# Altium PCB PCB1.PcbDoc
Units mm, origin at the board's own origin, x right, y up, seen from the top; angles counter-clockwise.
Board outline 152.4 x 101.6 mm, 2 copper layers (Top Layer, Bottom Layer); 26 components, 36 nets, 145 pads, 0 vias.
Unrouted connection lines stored in the file: 1.
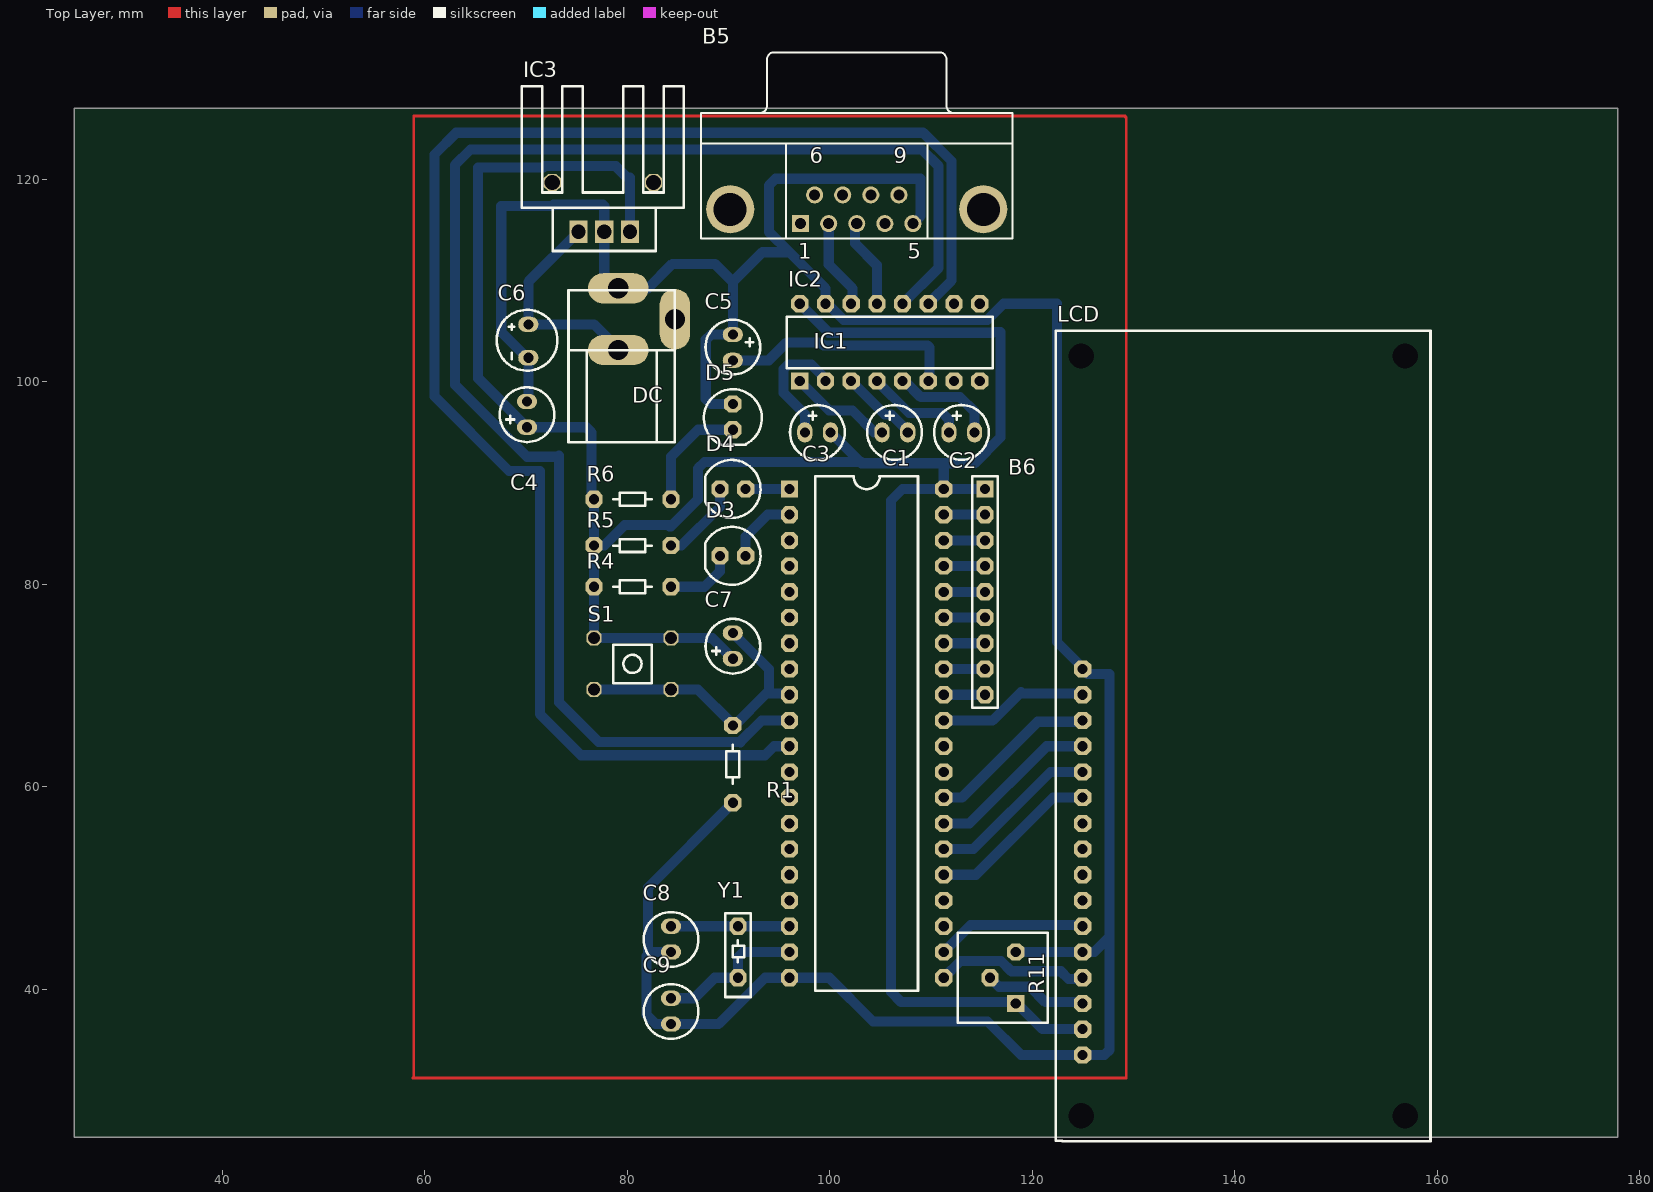
[diagram p0: Top Layer view]
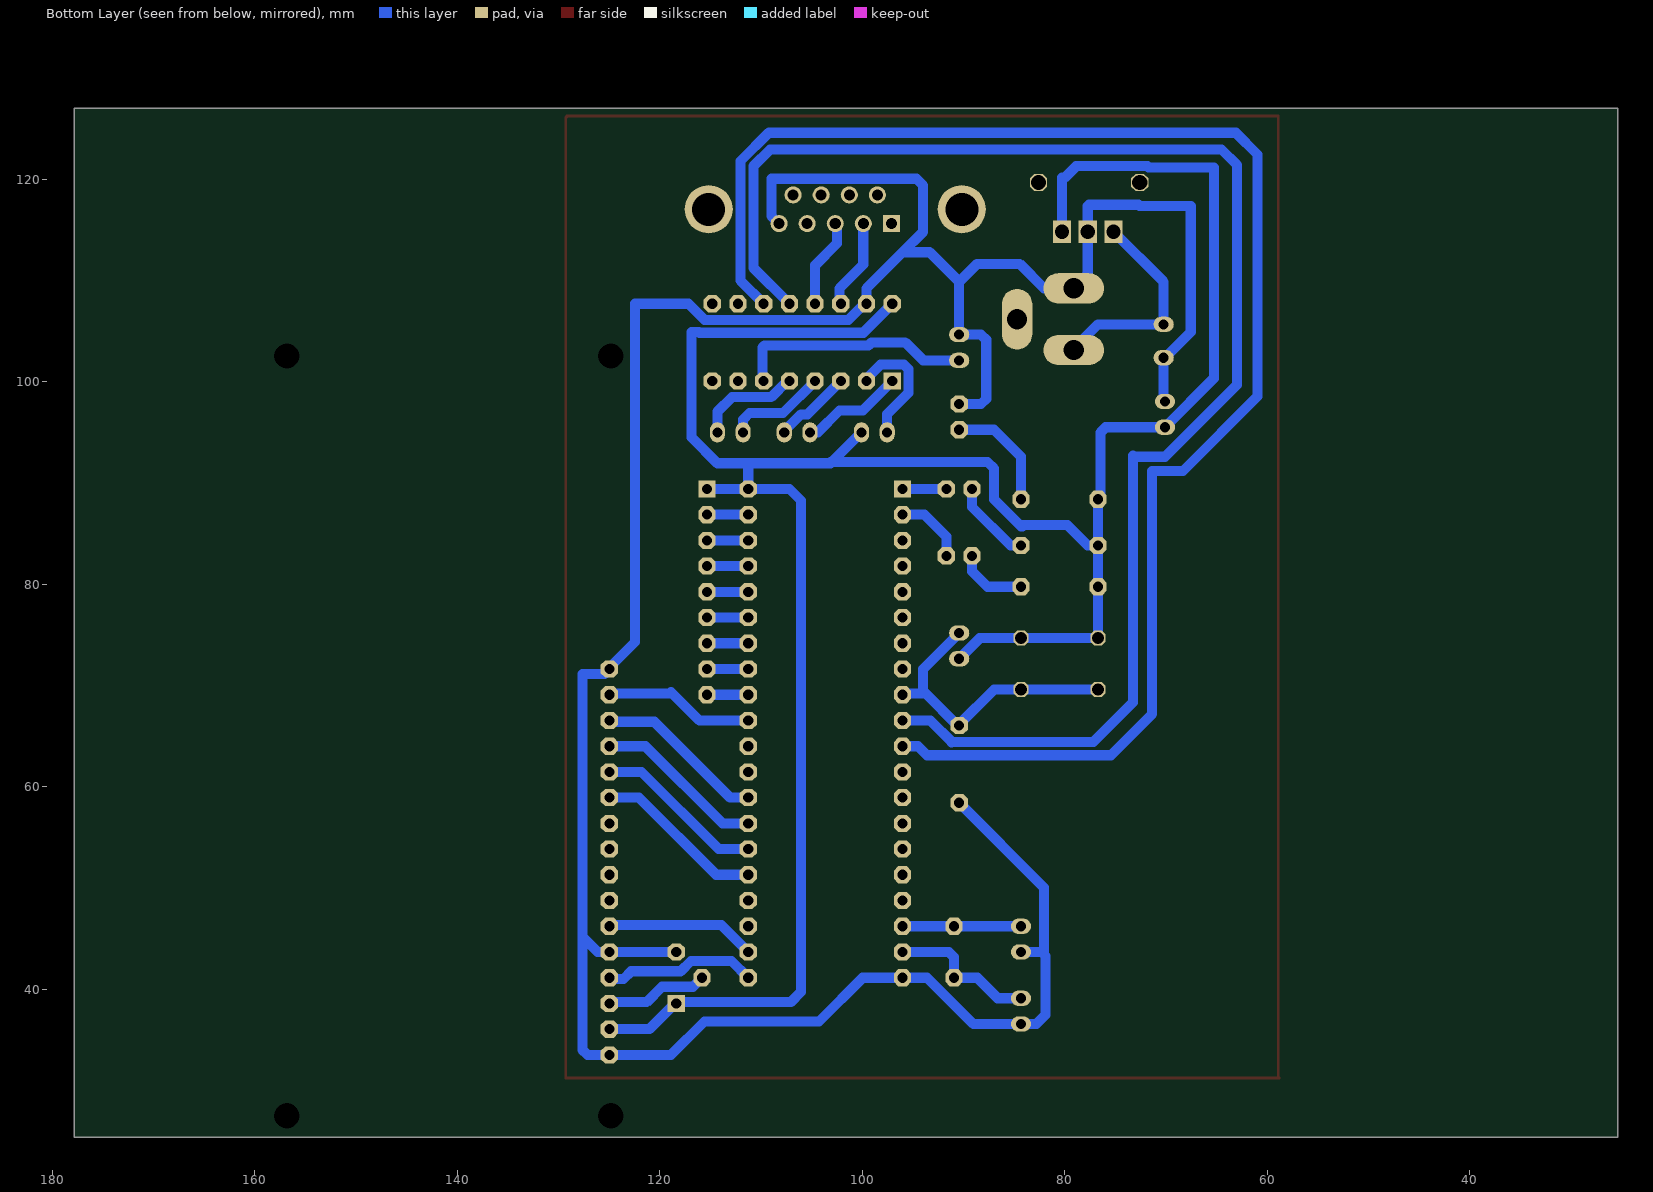
[diagram p1: Bottom Layer view, seen from below]

## Layer stack, top to bottom
Top Layer: signal copper 0.0356
Dielectric: dielectric 0.32, FR-4, Dk 4.8
Bottom Layer: signal copper 0.0356

## Board outline
25.4,25.4 177.8,25.4 177.8,127 25.4,127

## Design rules (kind name [scope] priority, off if disabled: settings)
Clearance [All] p1: gap=0.254
PolygonConnect [All] p1: connectstyle=Relief reliefconductorwidth=0.254 reliefentries=4 polygonreliefangle="90 Angle"
RoutingVias [All] p1: holewidth=0.711 width=1.27 viastyle="Through Hole" minholewidth=0.711 minwidth=1.27 maxholewidth=0.711 maxwidth=1.27
SilkscreenOverComponentPads [All] p1: minsilkscreentomaskgap=0.254
SolderMaskExpansion [All] p1: expansion=0.102
Width [All] p1: maxlimit=1 minlimit=1 preferedwidth=1
27 further rules are at their usual default settings.

## Components (designator, comment, footprint, x,y, rotation, side; value= is the part's Value field where it differs from the comment)
B5 "DB9 CONNECTOR FEMALE" "DB9 CONNECTOR FEMALE" 102.108,127 r0 top
B6 "BURG STRIP 9" bergstrip-9pin 115.316,89.408 r180 top
C1 "Cap2" CAP-100uf 105.156,94.996 r0 top
C2 "Cap2" CAP-100uf 111.76,94.996 r0 top
C3 "Cap2" CAP-100uf 97.536,94.996 r0 top
C4 "Cap2" CAP-100uf 70.104,95.504 r90 top
C5 "Cap2" CAP-100uf 90.424,104.648 r270 top
C6 "Cap-1000uf" CAP-1000uf 70.104,104.14 r270 top
C7 "Cap2" CAP-100uf 90.424,72.644 r90 top
C8 "Cap" CAP 84.328,43.688 r90 top
C9 "Cap" CAP 84.328,36.576 r90 top
D3 "LED-RED" LED-RED 90.424,82.804 r0 top
D4 "LED-RED" LED-RED 90.424,89.408 r0 top
D5 "LED-RED" LED-RED 90.424,96.52 r90 top
DC "PHONE JACK" "PHONE JACK" 74.168,93.98 r90 top
IC1 "AT89S52" AT89S52 96.012,89.408 r0 top
IC2 "dip-16pin" dip-16pin 114.808,100.076 r90 top
IC3 "Voltage Regulator" "7805 WITH HEAT-SINK" 75.184,114.808 r0 top
LCD "LCD-16X2" LCD-16x2 124.968,33.528 r90 top
R1 "Resistor" res-2.54x4 90.424,58.42 r90 top
R4 "Resistor" res-2.54x4 76.708,79.756 r0 top
R5 "Resistor" res-2.54x4 76.708,83.82 r0 top
R6 "Resistor" res-2.54x4 84.328,88.392 r180 top
R11 "Variable Resistor" reg-variable 115.824,41.148 r90 top
S1 "SW-PB" sw-pb 76.708,69.596 r90 top
Y1 "XTAL-LARGE" XTAL-LARGE 90.932,46.228 r270 top

## Footprints (in the part's own frame and the unit in brackets; to place one, negate y for a bottom-side part, rotate by r counter-clockwise, add the part's x,y. Pads: shape width x height; smd on the part's side, far side on the other; paste and mask are expansions set on the pad)
"7805 WITH HEAT-SINK" [mm]
  oct 1.7x1.7 hole 1.5: 0(-2.587,4.873) 0(7.413,4.873)
  rect 1.8x2.2 hole 1.4: 1(0,0) 2(2.54,0) 3(5.08,0)
  silkscreen extent -5.59,-1.91 10.41,14.37, body extent -5.59,-2.03 10.41,14.35, height 20.5
AT89S52 [mm]
  rect 1.7x1.7 hole 1: 1(0,0)
  oct 1.7x1.7 hole 1: 2(0,-2.54) 3(0,-5.08) 4(0,-7.62) 5(0,-10.16) 6(0,-12.7) 7(0,-15.24) 8(0,-17.78) 9(0,-20.32) 10(0,-22.86) 11(0,-25.4) 12(0,-27.94) 13(0,-30.48) 14(0,-33.02) 15(0,-35.56) 16(0,-38.1) 17(0,-40.64) 18(0,-43.18) 19(0,-45.72) 20(0,-48.26) 21(15.24,-48.26) 22(15.24,-45.72) 23(15.24,-43.18) 24(15.24,-40.64) 25(15.24,-38.1) 26(15.24,-35.56) 27(15.24,-33.02) 28(15.24,-30.48) 29(15.24,-27.94) 30(15.24,-25.4) 31(15.24,-22.86) 32(15.24,-20.32) 33(15.24,-17.78) 34(15.24,-15.24) 35(15.24,-12.7) 36(15.24,-10.16) 37(15.24,-7.62) 38(15.24,-5.08) 39(15.24,-2.54) 40(15.24,0)
  silkscreen extent 2.54,-49.53 12.7,1.27, body extent -0.76,-49.53 15.73,1.32, height 3
bergstrip-9pin [mm]
  rect 1.7x1.7 hole 1: 1(0,0)
  oct 1.7x1.7 hole 1: 2(0,2.54) 3(0,5.08) 4(0,7.62) 5(0,10.16) 6(0,12.7) 7(0,15.24) 8(0,17.78) 9(0,20.32)
  silkscreen extent -1.27,-1.27 1.27,21.59, body extent -1.27,-1.27 1.27,21.59, height 9.89
CAP [mm]
  oval 1.5x2 hole 1: 1(0,0) 2(2.54,0)
  silkscreen extent -1.46,-2.7 3.94,2.7, body extent -1.75,-3.04 4.32,3.04, height 7.01
CAP-100uf [mm]
  oval 1.5x2 hole 1: 1(0,0) 2(2.54,0)
  silkscreen extent -1.46,-2.7 3.94,2.7, body extent -1.75,-3.04 4.32,3.04, height 7.01
CAP-1000uf [mm]
  oval 1.5x2 hole 1: 1(-1.524,0.127) 2(1.778,0.127)
  silkscreen extent -2.95,-3 3.05,3, body extent -3.02,-3.05 3.05,3.04, height 10.1
"DB9 CONNECTOR FEMALE" [mm]
  rect 1.69x1.69 hole 1.09: 1(-4.986,-11.395)
  round 1.69 hole 1.09: 2(-2.216,-11.395) 3(0.554,-11.395) 4(3.324,-11.395) 5(6.094,-11.395) 6(-3.601,-8.555) 7(-0.831,-8.555) 8(1.939,-8.555) 9(4.709,-8.555)
  round 4.76 hole 3.26: 10(-11.941,-9.975) 11(13.049,-9.975)
  silkscreen extent -14.85,-12.88 15.95,5.53, body extent -14.94,-12.92 16.05,5.62, height 15
dip-16pin [mm]
  rect 1.7x1.7 hole 1: 1(0,17.78)
  oct 1.7x1.7 hole 1: 2(0,15.24) 3(0,12.7) 4(0,10.16) 5(0,7.62) 6(0,5.08) 7(0,2.54) 8(0,0) 9(7.62,0) 10(7.62,2.54) 11(7.62,5.08) 12(7.62,7.62) 13(7.62,10.16) 14(7.62,12.7) 15(7.62,15.24) 16(7.62,17.78)
  silkscreen extent 1.27,-1.27 6.35,19.05, body extent -0.13,-1.27 7.87,19.05, height 2.51
LCD-16x2 [mm]
  oct 1.7x1.7 hole 1: 1(0,0) 2(2.54,0) 3(5.08,0) 4(7.62,0) 5(10.16,0) 6(12.7,0) 7(15.24,0) 8(17.78,0) 9(20.32,0) 10(22.86,0) 11(25.4,0) 12(27.94,0) 13(30.48,0) 14(33.02,0) 15(35.56,0) 16(38.1,0)
  round 1.524 hole 2.5: no(-6,0.15) no(-6,-31.85) no(69,-31.85) no(69,0.15)
  silkscreen extent -8.51,-34.35 71.5,2.65, body extent -8.38,-34.04 71.37,2.67, height 21.6
LED-RED [mm]
  oct 1.7x1.7 hole 1: 1(-1.27,0) 2(1.27,0)
  silkscreen extent -2.74,-2.86 2.74,2.86, body extent -2.91,-2.67 2.67,2.92, height 9
"PHONE JACK" [mm]
  oval 3x6 hole 2: 1(9.144,-4.953) 2(15.24,-4.953)
  oval 6x3 hole 2: 3(12.192,-10.541)
  silkscreen extent 0.04,-10.53 15.04,-0.03, body extent -0.03,-10.67 16.78,0, height 8.97
reg-variable [mm]
  rect 1.7x1.7 hole 1: 1(-2.54,-2.54)
  oct 1.7x1.7 hole 1: 2(0,0) 3(2.54,-2.54)
  silkscreen extent -4.44,-5.71 4.44,3.18, body extent -4.44,-5.71 4.44,3.18, height 5.1
res-2.54x4 [mm]
  oct 1.7x1.7 hole 1: 1(0,0) 2(7.62,0)
  silkscreen extent 1.91,-0.63 5.71,0.64, body extent -0.51,-0.98 8.11,1.02, height 3
sw-pb [mm]
  oct 1.5x1.5 hole 1.2: 1(0,0) 1(0,-7.62) 2(5.08,0) 2(5.08,-7.62)
  silkscreen extent 0.64,-5.71 4.44,-1.9, body extent -0.76,-8.38 5.84,0.76, height 5.5
XTAL-LARGE [mm]
  oct 1.7x1.7 hole 1: 1(0,0) 2(5.08,0)
  silkscreen extent -1.27,-1.27 6.98,1.27, body extent -2.07,-2.25 7.87,2.19, height 13.15

## Part data
C8 C9: "Capacitor"
D3 D4 D5: "Typical BLUE SiC LED"
IC3: library part "7805 HEATSINK"
R1 R4 R5 R6: library part "Resistor 2.54x4"
S1: "Switch"
Y1: "Crystal Oscillator"

## Nets (pads, with @x,y where several pads share a name; then routed paths per layer and width w, separated by ;. In a path a pad name is that pad's centre, name@x,y a point inside that pad or via, vN(x,y) a via of type N, cw(c..) or ccw(c..) an arc to the next point about the centre after c; other vN are vias at no path point)
12V: C6.1 DC.1 IC3.1 | length 21.1
  Bottom Layer w1: C6.1 76.708,105.664 DC.1@79.248,103.124 ; C6.1@70.231,105.791 70.231,109.855 IC3.1
D4: IC1.25 LCD.11 | length 16.9
  Bottom Layer w1: IC1.25 114.427,51.308 122.047,58.928 LCD.11
D5: IC1.26 LCD.12 | length 16.9
  Bottom Layer w1: IC1.26 114.173,53.848 121.793,61.468 LCD.12
D6: IC1.27 LCD.13 | length 16.9
  Bottom Layer w1: IC1.27 113.792,56.388 121.412,64.008 LCD.13
D7: IC1.28 LCD.14 | length 16.9
  Bottom Layer w1: IC1.28 113.03,58.928 120.523,66.421 124.841,66.421 LCD.14
E: IC1.22 LCD.6 | length 14.9
  Bottom Layer w1: IC1.22 113.919,46.355 124.841,46.355 LCD.6
GND: B5.5 C4.2 C5.1 C6.2 C8.1 C9.1 D5.2 DC.2 IC1.20 IC2.15 IC3.2 LCD.1 LCD.5 LCD.16 R1.1 R11.3 | length 299
  Bottom Layer w1: C4.2@70.231,98.171 C6.2@70.231,102.235 ; C6.2 C6.2@70.231,102.235 ; DC.2@79.121,109.093 DC.2 ; 81.915,43.307 81.915,37.465 82.804,36.576 ; 82.042,43.434 82.042,50.038 R1.1 ; 82.296,43.688 C8.1 ; 82.931,36.576 C9.1 89.027,36.576 93.599,41.148 IC1.20 99.949,41.148 104.267,36.83 115.57,36.83 118.872,33.528 LCD.1 125.095,33.528 127.127,33.528 127.635,34.036 127.635,45.212 ; D5.2 88.265,97.79 87.757,98.298 87.757,104.14 88.265,104.648 C5.1 90.424,109.855 ; IC2.15@99.568,107.569 IC2.15 ; B5.5 108.966,116.369 108.966,120.015 ; 108.937,120.044 94.644,120.044 93.98,119.38 93.98,114.808 96.012,112.776 ; R11.3 LCD.5 126.111,43.688 127.635,45.212 ; LCD.16 125.476,71.12 127.635,71.12 127.635,45.212 ; LCD.16@125.095,71.628 122.428,74.295 122.428,107.696 117.149,107.696 115.545,106.092 101.371,106.092 99.767,107.696 IC2.15 ; C6.2@70.231,102.235 67.564,104.902 67.564,117.348 72.589,117.348 72.597,117.34 72.732,117.475 77.597,117.475 77.724,117.348 IC3.2 77.724,110.617 DC.2 ; DC.2 82.042,109.22 84.455,111.633 88.646,111.633 90.424,109.855 ; 90.424,109.855 93.345,112.776 96.012,112.776 ; 96.012,112.776 99.568,109.22 IC2.15
NetB6_2: B6.2 IC1.39 | length 4.1
  Bottom Layer w1: IC1.39 B6.2
NetB6_3: B6.3 IC1.38 | length 4.1
  Bottom Layer w1: IC1.38 B6.3
NetB6_4: B6.4 IC1.37 | length 4.1
  Bottom Layer w1: IC1.37 B6.4
NetB6_5: B6.5 IC1.36 | length 4.1
  Bottom Layer w1: IC1.36 B6.5
NetB6_6: B6.6 IC1.35 | length 4.1
  Bottom Layer w1: IC1.35 B6.6
NetB6_7: B6.7 IC1.34 | length 4.1
  Bottom Layer w1: IC1.34 B6.7
NetB6_8: B6.8 IC1.33 | length 4.1
  Bottom Layer w1: IC1.33 B6.8
NetB6_9: B6.9 IC1.32 | length 4.1
  Bottom Layer w1: IC1.32 B6.9
NetC1_1: C1.1 IC2.1 | length 10.2
  Bottom Layer w1: IC2.1 99.949,97.155 102.235,97.155 104.394,94.996 C1.1
NetC1_2: C1.2 IC2.3 | length 7.8
  Bottom Layer w1: IC2.3 105.41,96.774 106.045,96.774 107.696,95.123 C1.2
NetC2_1: C2.1 IC2.4 | length 10
  Bottom Layer w1: IC2.4 107.823,96.901 111.125,96.901 111.76,96.266 C2.1
NetC2_2: C2.2 IC2.5 | length 10.4
  Bottom Layer w1: IC2.5 107.387,100.076 108.991,98.472 112.856,98.472 114.3,97.028 C2.2
NetC3_1: C3.1 IC2.2 | length 12.2
  Bottom Layer w1: C3.1 97.536,96.802 95.424,98.914 95.424,101.238 95.866,101.68 98.19,101.68 99.568,100.302 IC2.2
NetC5_2: C5.2 IC2.6 | length 23.7
  Bottom Layer w1: C5.2 93.98,102.108 95.758,103.886 99.065,103.886 99.367,103.584 109.649,103.584 109.855,103.378 109.855,100.33 IC2.6@109.728,100.203 ; IC2.6@109.728,99.949 IC2.6
NetD3_1: D3.1 R4.2 | length 7.2
  Bottom Layer w1: R4.2 87.63,79.756 89.154,81.28 D3.1 D3.1@89.027,82.677
NetD3_2: D3.2 IC1.2 | length 7.1
  Bottom Layer w1: D3.2 91.694,84.709 93.853,86.868 IC1.2
NetD4_1: D4.1 R5.2 | length 8.2
  Bottom Layer w1: R5.2 85.344,83.82 89.154,87.63 D4.1
NetD4_2: D4.2 IC1.1 | length 4.4
  Bottom Layer w1: D4.2@91.694,89.535 D4.2 IC1.1
NetD5_1: D5.1 R6.1 | length 11.4
  Bottom Layer w1: R6.1 84.328,92.583 86.995,95.25 D5.1
NetLCD_3: LCD.3 R11.2 | length 10.2
  Bottom Layer w1: R11.2 116.713,40.259 119.761,40.259 121.285,38.735 124.841,38.735 LCD.3
RS: IC1.21 LCD.4 | length 15.3
  Bottom Layer w1: IC1.21 112.903,42.799 116.912,42.799 117.928,41.783 122.809,41.783 123.571,41.021 LCD.4@124.841,41.021 ; LCD.4@124.968,41.021 LCD.4@124.841,41.021 ; LCD.4 LCD.4@124.841,41.021
RST: C7.2 IC1.9 R1.2 S1.1 | length 29.8
  Bottom Layer w1: S1.1@76.708,69.596 84.328,69.596 86.995,69.596 R1.2@90.424,66.167 ; R1.2 90.551,66.04 93.726,69.215 93.98,69.215 ; C7.2 93.98,71.628 93.98,69.215 ; IC1.9 IC1.9@95.885,69.215 ; IC1.9@96.139,69.215 IC1.9@95.885,69.215 ; 93.98,69.215 IC1.9@95.885,69.215
RX: IC1.10 IC2.12 | length 148.8
  Bottom Layer w1: 91.161,64.436 93.273,66.548 IC1.10 ; 91.186,64.389 91.139,64.436 77.169,64.436 73.279,68.326 73.279,92.71 73.152,92.583 70.104,92.583 62.992,99.695 62.992,121.412 64.516,122.936 109.093,122.936 110.744,121.285 110.744,111.252 IC2.12
RX1: B5.2 IC2.14 | length 8.9
  Bottom Layer w1: B5.2 99.892,111.563 102.235,109.22 IC2.14@102.235,107.696
TX: IC1.11 IC2.11 | length 156.4
  Bottom Layer w1: IC1.11@95.885,64.135 IC1.11 94.488,64.008 93.599,63.119 75.438,63.119 71.374,67.183 71.374,91.186 68.326,91.186 60.96,98.552 60.96,122.428 63.119,124.587 109.215,124.587 112.014,121.788 112.014,109.982 IC2.11
TX1: B5.3 IC2.13 | length 8.9
  Bottom Layer w1: B5.3@102.616,115.697 102.489,115.57 102.489,113.665 104.648,111.506 IC2.13
VCC: B6.1 C3.2 C4.1 C7.1 IC1.31 IC1.40 IC2.16 IC3.3 LCD.2 LCD.15 R4.1 R5.1 R6.2 R11.1 S1.2 | length 268.7
  Bottom Layer w1: R6.2@76.581,88.265 76.454,88.392 76.454,94.996 75.946,95.504 C4.1 65.278,100.33 65.278,121.158 71.733,121.158 71.86,121.285 78.867,121.285 80.01,120.142 80.264,120.142 IC3.3 IC3.3@80.264,114.681 ; R6.2 R5.1 ; 84.201,85.725 84.074,85.852 79.756,85.852 77.724,83.82 R5.1 ; 84.328,85.725 86.995,88.392 86.995,91.44 87.63,92.075 102.997,92.075 ; C7.1 88.392,74.676 84.328,74.676 76.708,74.676 R4.1 R5.1 ; IC2.16 99.886,104.838 116.065,104.838 116.129,104.902 116.84,104.902 116.84,94.488 114.3,91.948 111.252,91.948 ; C3.2 102.997,92.075 ; 103.124,92.075 102.997,92.075 ; IC1.31 116.078,66.548 118.745,69.215 ; B6.1 IC1.40 ; 118.872,69.342 118.745,69.215 ; LCD.2 121.031,36.068 118.364,38.735 107.061,38.735 106.045,39.751 106.045,88.265 107.188,89.408 IC1.40 ; LCD.15 124.841,69.215 118.745,69.215 ; 102.997,92.075 103.124,91.948 111.252,91.948 ; IC1.40 111.252,91.948
XTL1: C8.2 IC1.18 Y1.1 | length 11.7
  Bottom Layer w1: C8.2 Y1.1 IC1.18
XTL2: C9.2 IC1.19 Y1.2 | length 14.8
  Bottom Layer w1: C9.2 86.614,39.116 88.646,41.148 Y1.2 90.932,43.18 91.44,43.688 IC1.19
pads on no net: B5.1 B5.4 B5.6 B5.7 B5.8 B5.9 B5.10 B5.11 DC.3 IC1.3 IC1.4 IC1.5 IC1.6 IC1.7 IC1.8 IC1.12 IC1.13 IC1.14 IC1.15 IC1.16 IC1.17 IC1.23 IC1.24 IC1.29 IC1.30 IC2.7 IC2.8 IC2.9 IC2.10 IC3.0 LCD.7 LCD.8 LCD.9 LCD.10 LCD.no
copper on no net: | length 330.9
  Top Layer w0.254: 129.159,126.111 129.032,126.238 58.928,126.238 58.928,31.369 58.801,31.242 129.286,31.242 129.286,126.111 129.159,126.238

## Text inside footprints (layer, text, board x,y; h text height)
B5: Top Overlay "6" at 98.007,121.55 h1.5; Top Overlay "9" at 106.317,121.55 h1.5; Top Overlay "5" at 107.702,112.15 h1.5; Top Overlay "1" at 96.872,112.15 h1.5